# Altium PCB PCB2.PcbDoc
Units mm, origin at the board's own origin, x right, y up, seen from the top; angles counter-clockwise.
Board outline 90 x 105 mm, 2 copper layers (Top Layer, Bottom Layer); 14 components, 47 nets, 130 pads, 23 vias.
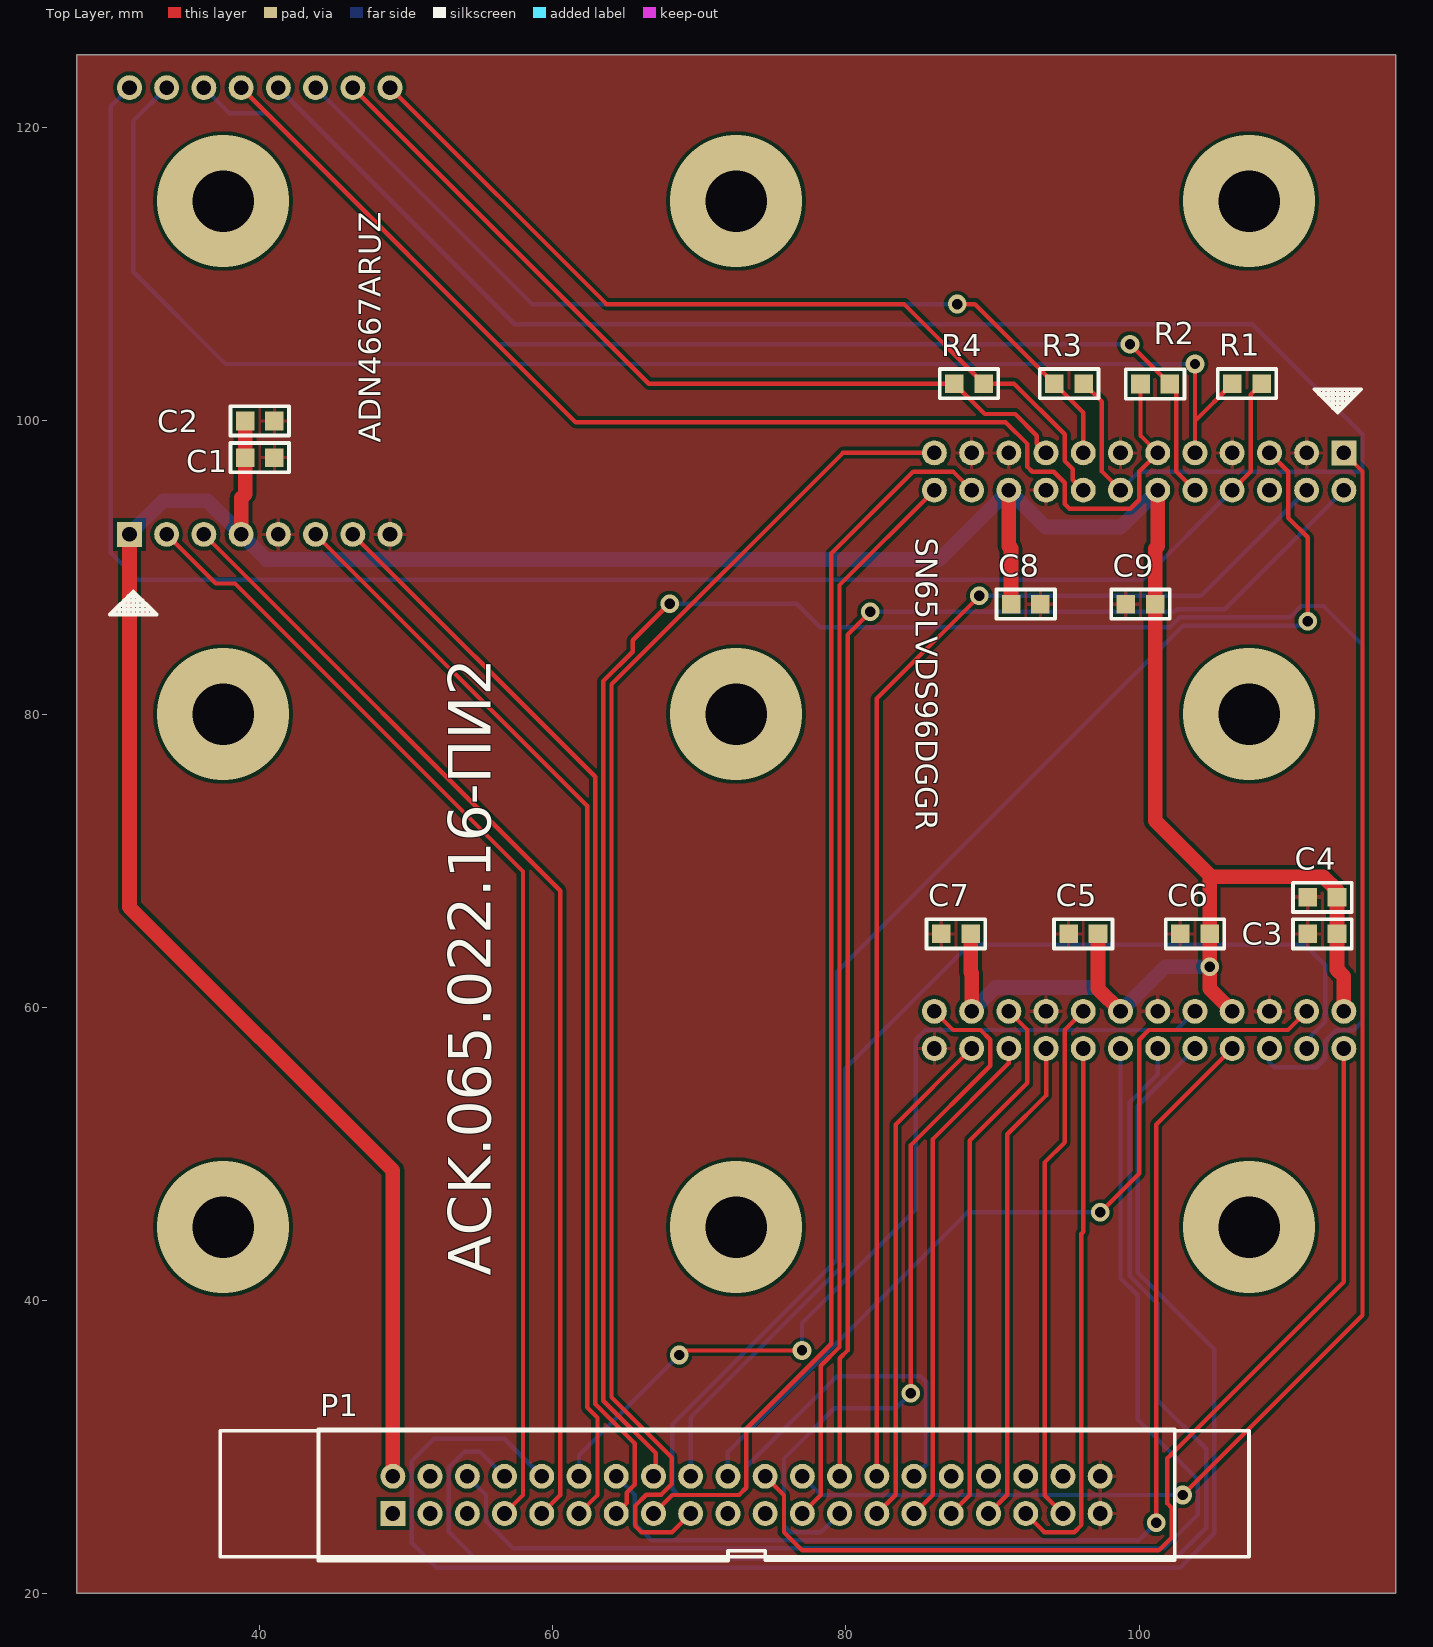
[diagram p0: Top Layer view]
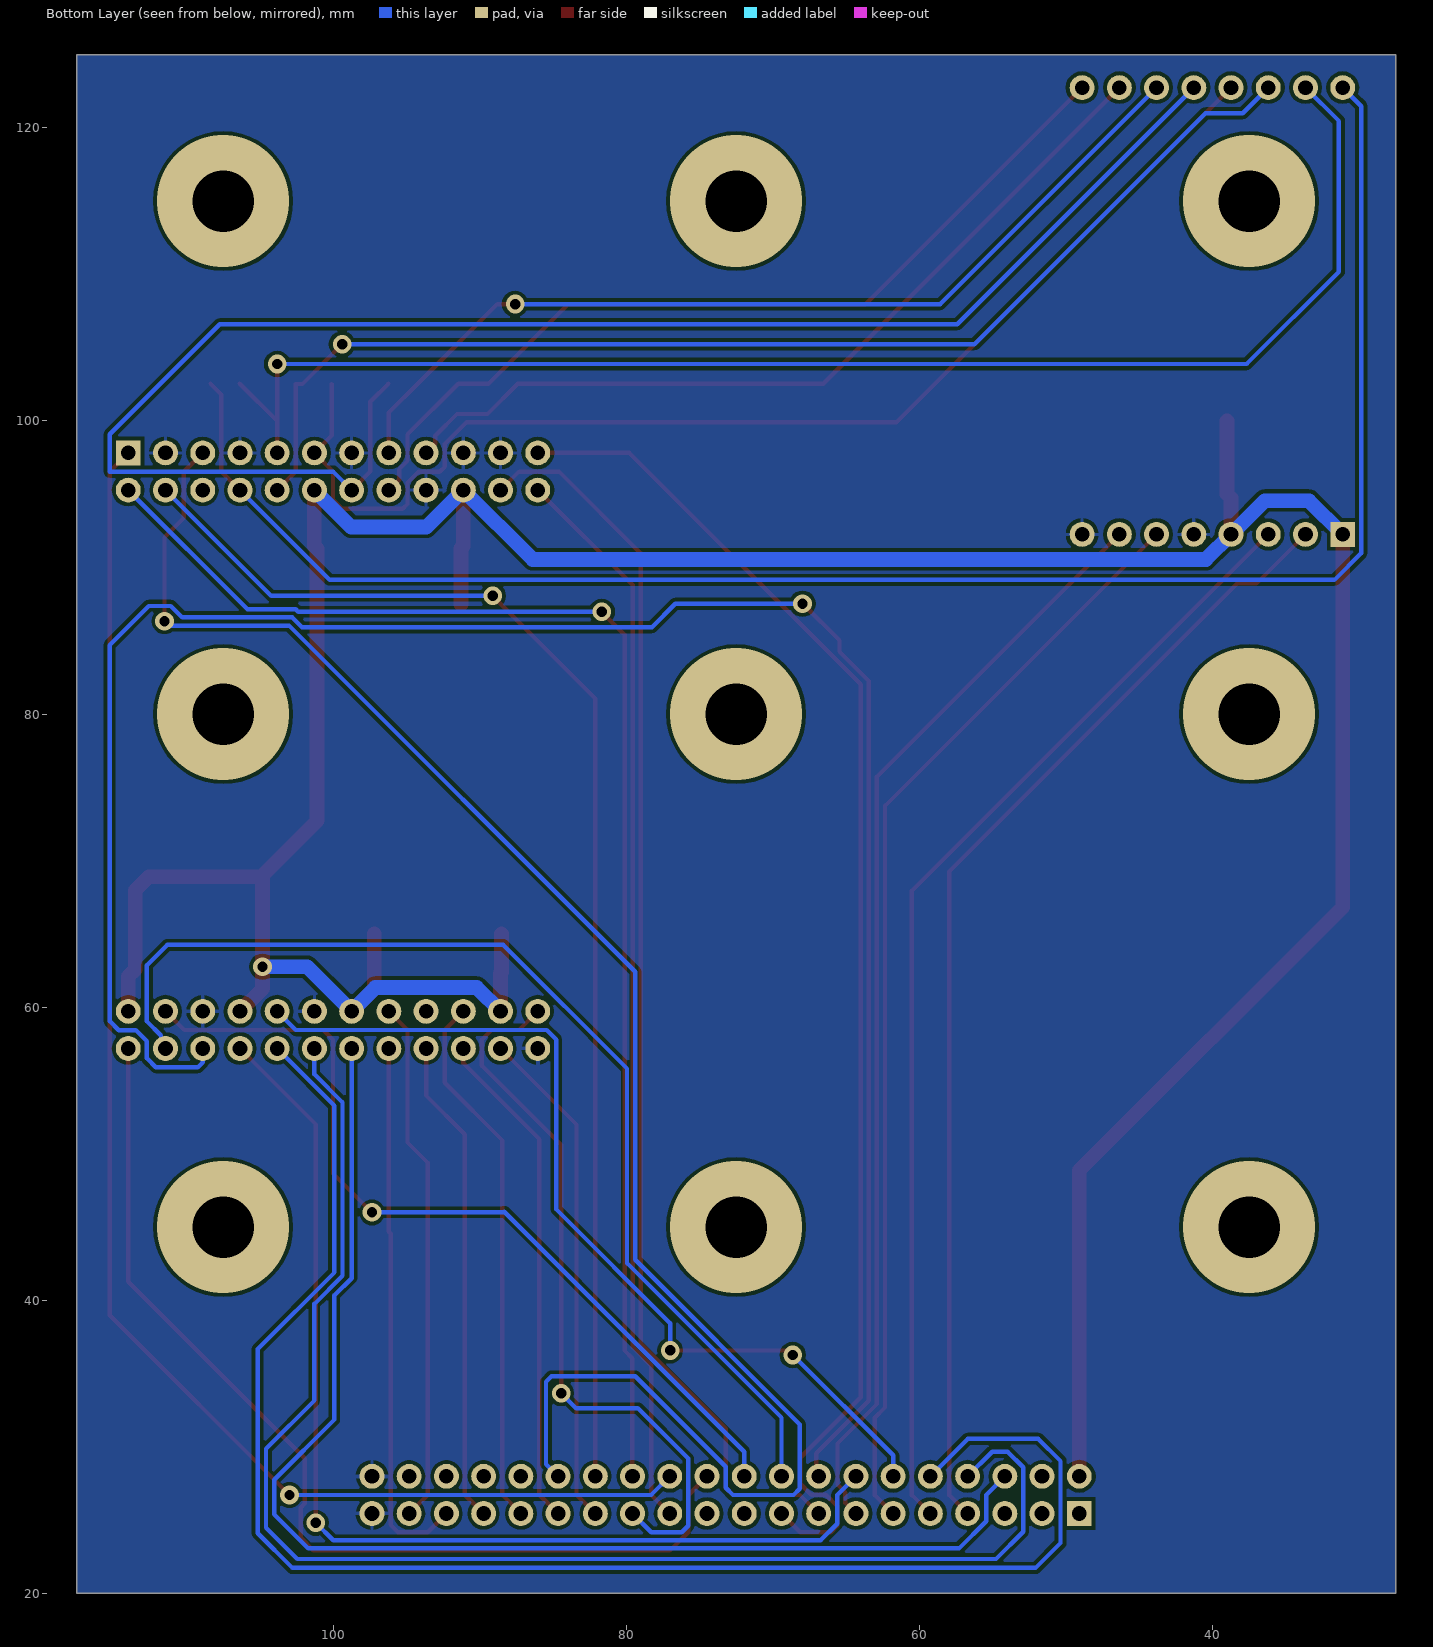
[diagram p1: Bottom Layer view, seen from below]

## Layer stack, top to bottom
Top Solder: solder mask 0.0102, Solder Resist, Dk 3.5
Top Layer: signal copper 0.0356
Dielectric 1: dielectric 0.32, FR-4, Dk 4.8
Bottom Layer: signal copper 0.0356
Bottom Solder: solder mask 0.0102, Solder Resist, Dk 3.5

## Board outline
27.5,20 117.5,20 117.5,125 27.5,125

## Design rules (kind name [scope] priority, off if disabled: settings)
Clearance [All] p1: gap=0.254
ComponentClearance [All] p1 off: gap=0.254 collisioncheckmode=3 verticalgap=0.254 showdistances=FALSE
PolygonConnect [All] p1: connectstyle=Relief reliefconductorwidth=0.254 reliefentries=4 polygonreliefangle="90 Angle" airgapwidth=0.254
RoutingVias [All] p1: holewidth=0.711 width=1.27 viastyle="Through Hole" minholewidth=0.711 minwidth=1.27 maxholewidth=0.711 maxwidth=1.27
SolderMaskExpansion [All] p1: expansion=0.102
Width Width_1 [InNetClass('power')] p1: maxlimit=1 minlimit=1 preferedwidth=1
Width [All] p2: maxlimit=0.3 minlimit=0.3 preferedwidth=0.3
29 further rules are at their usual default settings.

## Classes and differential pairs
net class power: GND VCC

## Components (designator, comment, footprint, x,y, rotation, side; value= is the part's Value field where it differs from the comment)
C1 "1uF" C_0805 40,97.5 r0 top
C2 "0.1uF" C_0805 40,100 r0 top
C3 "1uF" C_0805 112.5,65 r180 top
C4 "0.1uF" C_0805 112.5,67.5 r180 top
C5 "0.1uF" C_0805 96.19,65 r180 top
C6 "0.1uF" C_0805 103.81,65 r180 top
C7 "0.1uF" C_0805 87.5,65 r180 top
C8 "0.1uF" C_0805 92.263,87.5 r0 top
C9 "0.1uF" C_0805 100.091,87.5 r180 top
P1 "IDC-40" IDC-40 73.213,26.725 r90 top (schematic designator P7)
R1 "100 Om" R_0805 107.361,102.542 r0 top
R2 "100 Om" R_0805 101.091,102.521 r0 top
R3 "100 Om" R_0805 95.22,102.542 r0 top
R4 "100 Om" R_0805 88.391,102.542 r180 top

## Footprints (in the part's own frame and the unit in brackets; to place one, negate y for a bottom-side part, rotate by r counter-clockwise, add the part's x,y. Pads: shape width x height; smd on the part's side, far side on the other; paste and mask are expansions set on the pad)
C_0805 [mm]
  rect 1.27x1.27 smd: 1(-1,0) 2(1,0)
  silkscreen extent -2,-1 2,1
IDC-40 [mm]
  rect 1.7x1.7 hole 1: 1(-1.27,24.13)
  round 1.7 hole 1: 2(1.27,24.13) 3(-1.27,21.59) 4(1.27,21.59) 5(-1.27,19.05) 6(1.27,19.05) 7(-1.27,16.51) 8(1.27,16.51) 9(-1.27,13.97) 10(1.27,13.97) 11(-1.27,11.43) 12(1.27,11.43) 13(-1.27,8.89) 14(1.27,8.89) 15(-1.27,6.35) 16(1.27,6.35) 17(-1.27,3.81) 18(1.27,3.81) 19(-1.27,1.27) 20(1.27,1.27) 21(-1.27,-1.27) 22(1.27,-1.27) 23(-1.27,-3.81) 24(1.27,-3.81) 25(-1.27,-6.35) 26(1.27,-6.35) 27(-1.27,-8.89) 28(1.27,-8.89) 29(-1.27,-11.43) 30(1.27,-11.43) 31(-1.27,-13.97) 32(1.27,-13.97) 33(-1.27,-16.51) 34(1.27,-16.51) 35(-1.27,-19.05) 36(1.27,-19.05) 37(-1.27,-21.59) 38(1.27,-21.59) 39(-1.27,-24.13) 40(1.27,-24.13)
  silkscreen extent -4.47,-29.21 4.48,29.21
R_0805 [mm]
  rect 1.27x1.27 smd: 1(-1,0) 2(1,0)
  silkscreen extent -2,-1 2,1

## Part data
C1 C2 C3 C4 C5 C6 C7 C8 C9: library part "capacitor 0805"
P1: "разъем 2529"
R1 R2 R3 R4: library part "resistor 0805"

## Free pads (board coordinates)
  rect 1.7x1.7 hole 1: 1(31.11,92.26) 1(113.97,97.82)
  round 1.7 hole 1: 2(33.65,92.26) 2(113.97,95.28) 3(36.19,92.26) 3(111.43,97.82) 4(38.73,92.26) 4(111.43,95.28) 5(41.27,92.26) 5(108.89,97.82) 6(43.81,92.26) 6(108.89,95.28) 7(46.35,92.26) 7(106.35,97.82) 8(48.89,92.26) 8(106.35,95.28) 9(48.89,122.74) 9(103.81,97.82) 10(46.35,122.74) 10(103.81,95.28) 11(43.81,122.74) 11(101.27,97.82) 12(41.27,122.74) 12(101.27,95.28) 13(38.73,122.74) 13(98.73,97.82) 14(36.19,122.74) 14(98.73,95.28) 15(33.65,122.74) 15(96.19,97.82) 16(31.11,122.74) 16(96.19,95.28) 17(93.65,97.82) 18(93.65,95.28) 19(91.11,97.82) 20(91.11,95.28) 21(88.57,97.82) 22(88.57,95.28) 23(86.03,97.82) 24(86.03,95.28) 25(86.03,57.18) 26(86.03,59.72) 27(88.57,57.18) 28(88.57,59.72) 29(91.11,57.18) 30(91.11,59.72) 31(93.65,57.18) 32(93.65,59.72) 33(96.19,57.18) 34(96.19,59.72) 35(98.73,57.18) 36(98.73,59.72) 37(101.27,57.18) 38(101.27,59.72) 39(103.81,57.18) 40(103.81,59.72) 41(106.35,57.18) 42(106.35,59.72) 43(108.89,57.18) 44(108.89,59.72) 45(111.43,57.18) 46(111.43,59.72) 47(113.97,57.18) 48(113.97,59.72)

## Via types
v1: diameter 1.27, hole 0.711, Top Layer to Bottom Layer, 14 vias
v2: diameter 9, hole 4.2, Top Layer to Bottom Layer, 9 vias

## Nets (pads, with @x,y where several pads share a name; then routed paths per layer and width w, separated by ;. In a path a pad name is that pad's centre, name@x,y a point inside that pad or via, vN(x,y) a via of type N, cw(c..) or ccw(c..) an arc to the next point about the centre after c; other vN are vias at no path point)
5V: P1.1
+6V: P1.5
+24V: P1.3
-24V: P1.4
GND: C1.2 C2.2 C3.2 C4.2 C5.2 C6.2 C7.2 C8.2 C9.2 P1.39 P1.40 pad.3@111.43,97.82 pad.5@41.27,92.26 pad.7@106.35,97.82 pad.8@48.89,92.26 pad.13@98.73,97.82 pad.18 pad.19 pad.21 pad.25 pad.32 pad.38 pad.44 | length 0
GND24: P1.38
NetADN4667ARUZ_9: pad.9@48.89,122.74 pad.16@96.19,95.28 R4.1 | length 60.2
  Top Layer w0.3: pad.9@48.89,122.74 63.655,107.975 83.957,107.975 R4.1 91.463,102.542 94.92,99.085 94.92,97.271 95.474,96.717 95.474,95.996 pad.16@96.19,95.28
NetADN4667ARUZ_10: pad.10@46.35,122.74 pad.17 R4.2 | length 57.9
  Top Layer w0.3: pad.10@46.35,122.74 66.548,102.542 R4.2 89.46,100.473 91.542,100.473 93.022,98.993 93.022,98.448 pad.17
NetADN4667ARUZ_11: pad.11@43.81,122.74 pad.15@96.19,97.82 R3.1 | length 64.3
  Top Layer w0.3: v1(87.579,107.975) 88.787,107.975 R3.1 96.19,100.572 pad.15@96.19,97.82
  Bottom Layer w0.3: pad.11@43.81,122.74 58.575,107.975 v1(87.579,107.975)
NetADN4667ARUZ_12: pad.12@41.27,122.74 pad.14@98.73,95.28 R3.2 | length 111.6
  Top Layer w0.3: R3.2 97.46,101.303 97.46,96.55 pad.14@98.73,95.28
  Bottom Layer w0.3: pad.12@41.27,122.74 57.406,106.604 107.721,106.604 115.24,99.085 115.24,96.545 99.995,96.545 pad.14@98.73,95.28
NetADN4667ARUZ_13: pad.11@101.27,97.82 pad.13@38.73,122.74 R2.1 | length 84.1
  Top Layer w0.3: pad.13@38.73,122.74 61.551,99.919 90.886,99.919 92.38,98.425 92.38,96.864 92.71,96.534 94.169,96.534 94.92,95.784 94.92,94.336 95.25,94.005 99.39,94.005 100,94.615 100,96.55 101.27,97.82 100.091,98.999 R2.1
NetADN4667ARUZ_14: pad.10@103.81,95.28 pad.14@36.19,122.74 R2.2 | length 82.5
  Top Layer w0.3: v1(99.379,105.232) R2.2 102.54,102.521 102.54,96.55 pad.10@103.81,95.28
  Bottom Layer w0.3: pad.14@36.19,122.74 37.93,121 40.47,121 56.238,105.232 v1(99.379,105.232)
NetADN4667ARUZ_15: pad.9@103.81,97.82 pad.15@33.65,122.74 R1.1 | length 98.2
  Top Layer w0.3: pad.9@103.81,97.82 103.81,99.991 ; v1(103.81,103.886) 103.81,99.991 ; R1.1 103.81,99.991
  Bottom Layer w0.3: pad.15@33.65,122.74 31.368,120.458 31.368,110.186 37.668,103.886 v1(103.81,103.886)
NetADN4667ARUZ_16: pad.8@106.35,95.28 pad.16@31.11,122.74 R1.2 | length 120.2
  Top Layer w0.3: pad.8@106.35,95.28 107.62,96.55 107.62,101.801 R1.2
  Bottom Layer w0.3: pad.16@31.11,122.74 29.845,121.475 29.845,90.983 31.674,89.154 100.224,89.154 pad.8@106.35,95.28
PA0: P1.7 pad.2@33.65,92.26 | length 78.2
  Top Layer w0.3: pad.2@33.65,92.26 37,88.91 38.311,88.91 57.963,69.258 57.963,26.715 P1.7
PA1: P1.9 pad.3@36.19,92.26 | length 77.4
  Top Layer w0.3: pad.3@36.19,92.26 60.503,67.947 60.503,26.715 P1.9
PA2: P1.11 pad.6@43.81,92.26 | length 75.3
  Top Layer w0.3: pad.6@43.81,92.26 62.338,73.732 62.338,32.695 63.043,31.99 63.043,26.715 P1.11
PA3: P1.13 pad.7@46.35,92.26 | length 75.3
  Top Layer w0.3: pad.7@46.35,92.26 62.892,75.718 62.892,32.925 65.583,30.234 65.583,27.428 65.039,26.884 65.039,26.171 P1.13
PA4: P1.15 pad.22 | length 85.6
  Top Layer w0.3: P1.15 66.88,25.455 68.146,26.721 72.707,26.721 73.203,27.216 73.203,31.242 79,37.039 79,90.963 84.582,96.545 87.305,96.545 pad.22
PA5: P1.17 pad.23 | length 93.8
  Top Layer w0.3: P1.17 68.129,24.181 66.04,24.181 65.609,24.612 65.609,25.974 66.376,26.741 67.382,26.741 68.123,27.481 68.123,29.261 64,33.384 64,82.029 79.791,97.82 pad.23
PA6: P1.19
PA7: P1.21
PB0: P1.23 pad.24 | length 73.6
  Top Layer w0.3: P1.23 78.283,26.715 78.283,35.539 79.554,36.81 79.554,88.804 pad.24
PB1: P1.25 pad.26 | length 50.6
  Top Layer w0.3: v1(84.43,33.655) 84.43,50.597 89.84,56.007 89.84,57.785 89.179,58.445 87.305,58.445 pad.26
  Bottom Layer w0.3: P1.25 78.289,24.181 76.2,24.181 75.768,24.613 75.768,29.21 79.197,32.639 83.414,32.639 v1(84.43,33.655)
PB2: P1.27 pad.27 | length 34.4
  Top Layer w0.3: P1.27 83.388,26.74 83.388,51.998 pad.27
PB3: P1.29 pad.29 | length 34.4
  Top Layer w0.3: P1.29 85.928,26.74 85.928,51.003 91.11,56.185 pad.29
PB4: P1.31 pad.30 | length 36.9
  Top Layer w0.3: P1.31 88.443,26.715 88.443,50.902 92.38,54.839 92.38,58.45 pad.30
PB5: P1.33 pad.31 | length 33.4
  Top Layer w0.3: P1.33 91.008,26.74 91.008,51.333 93.65,53.975 pad.31
PB6: P1.35 pad.33 | length 37.1
  Top Layer w0.3: P1.35 93.537,24.181 95.567,24.181 96.063,24.676 96.063,44.552 96.19,44.679 pad.33
PB7: P1.37 pad.34 | length 35.9
  Top Layer w0.3: P1.37 93.548,26.71 93.548,49.403 94.92,50.775 94.92,58.45 pad.34
PC0: P1.6 pad.35 | length 87.9
  Bottom Layer w0.3: P1.6 55.437,26.721 55.437,24.928 57.293,23.073 101.691,23.073 104.013,25.395 104.013,27.762 99.904,31.871 99.904,40.339 98.73,41.513 pad.35
PC1: P1.8 pad.37 | length 98.3
  Bottom Layer w0.3: P1.8 55.021,29.677 53.974,29.677 52.908,28.611 52.908,24.206 54.762,22.352 102.438,22.352 104.572,24.486 104.572,29.87 101.27,33.172 101.27,39.757 99.35,41.677 99.35,53.503 101.27,55.423 pad.37
PC2: P1.10 pad.39 | length 109.5
  Bottom Layer w0.3: P1.10 56.682,30.556 51.892,30.556 50.368,29.032 50.368,23.444 52.07,21.742 102.768,21.742 105.131,24.105 105.131,36.679 99.904,41.906 99.904,53.274 pad.39
PC3: P1.12 pad.40 | length 63.9
  Top Layer w0.3: v1(68.631,36.271) 68.94,36.58 v1(77,36.58)
  Bottom Layer w0.3: P1.12 61.783,29.423 v1(68.631,36.271) ; v1(77,36.58) 77,38.443 84.76,46.203 84.76,57.785 85.42,58.445 102.535,58.445 pad.40
PC4: P1.14 pad.41 | length 74.8
  Top Layer w0.3: v1(101.168,24.816) 101.168,51.998 pad.41
  Bottom Layer w0.3: P1.14 65.597,26.721 65.597,24.765 66.735,23.627 99.979,23.627 v1(101.168,24.816)
PC5: P1.16 pad.43 | length 147.7
  Top Layer w0.3: P1.16 67.031,28.163 67.031,29.57 63.446,33.154 63.446,82.259 65.446,84.259 65.446,85.029 67.945,87.528 v1(67.97,87.528)
  Bottom Layer w0.3: v1(67.97,87.528) 76.642,87.528 78.239,85.931 102.114,85.931 102.777,86.593 110.286,86.593 111.07,87.377 112.572,87.377 115.24,84.709 115.24,59.055 114.619,58.434 113.451,58.434 112.7,57.683 112.7,56.515 112.09,55.905 109.22,55.905 108.89,56.235 pad.43
PC6: P1.18 pad.45 | length 75.2
  Bottom Layer w0.3: P1.18 69.403,32.001 79.942,42.54 79.942,55.812 88.398,64.268 111.297,64.268 112.7,62.865 112.7,59.03 111.76,58.09 pad.45
PC7: P1.20 pad.46 | length 59
  Top Layer w0.3: v1(97.343,46) 100,48.657 100,57.785 100.66,58.445 110.155,58.445 pad.46
  Bottom Layer w0.3: P1.20 71.943,29.677 88.316,46.05 88.366,46 v1(97.343,46)
PD0: P1.22 pad.47 | length 70.1
  Top Layer w0.3: P1.22 75.768,26.71 75.768,24.181 77.013,22.936 101.346,22.936 102.21,23.8 102.21,25.857 101.93,26.137 101.93,29.23 113.97,41.27 pad.47
PD1: P1.24 pad.1@113.97,97.82 | length 103.2
  Top Layer w0.3: v1(102.972,26.721) 115.24,38.989 115.24,96.55 pad.1@113.97,97.82
  Bottom Layer w0.3: P1.24 78.297,26.721 v1(102.972,26.721)
PD2: P1.26 pad.2@113.97,95.28 | length 95.6
  Top Layer w0.3: P1.26 79.578,28.931 79.578,36.05 80.108,36.58 80.108,85.417 v1(81.661,86.97)
  Bottom Layer w0.3: v1(81.661,86.97) 102.37,86.97 102.547,87.147 105.837,87.147 pad.2@113.97,95.28
PD3: P1.28 pad.4@111.43,95.28 | length 88.3
  Top Layer w0.3: P1.28 82.103,81.062 v1(89.103,88.062)
  Bottom Layer w0.3: v1(89.103,88.062) 104.212,88.062 pad.4@111.43,95.28
PD4: P1.30 pad.5@108.89,97.82 | length 123.3
  Top Layer w0.3: pad.5@108.89,97.82 110.176,96.534 110.176,93.383 111.5,92.058 v1(111.5,86.338)
  Bottom Layer w0.3: P1.30 85.471,28.823 85.471,34.442 85.09,34.823 79.388,34.823 73.203,28.639 73.203,27.216 72.707,26.721 68.58,26.721 68.148,27.153 68.148,31.53 79.388,42.769 79.388,62.42 103.006,86.039 111.412,86.039 111.5,86.127 v1(111.5,86.338)
PD5: P1.32
PD6: P1.34
PD7: P1.36
VCC: C1.1 C2.1 C3.1 C4.1 C5.1 C6.1 C7.1 C8.1 C9.1 P1.2 pad.1@31.11,92.26 pad.4@38.73,92.26 pad.12@101.27,95.28 pad.20 pad.28 pad.36 pad.42 pad.48 | length 249.6
  Top Layer w1: pad.1@31.11,92.26 31.11,66.832 49.083,48.859 P1.2 ; pad.4@38.73,92.26 38.73,94.742 39,95.012 C1.1 C2.1 ; C7.1 88.5,62.376 88.57,62.306 pad.28 ; pad.20 91.11,91.466 91.263,91.313 C8.1 ; C5.1 97.19,61.26 pad.36 ; pad.12@101.27,95.28 101.27,91.467 101.091,91.288 C9.1 101.091,72.719 104.81,69 C6.1 v1(104.81,62.763) 104.81,61.26 pad.42 ; 104.9,68.91 112.573,68.91 113.5,67.983 C4.1 C3.1 113.5,62.573 113.97,62.103 pad.48
  Bottom Layer w1: pad.1@31.11,92.26 33.414,94.564 36.426,94.564 38.73,92.26 40.439,90.551 86.381,90.551 pad.20 93.629,92.761 98.751,92.761 pad.12@101.27,95.28 ; pad.28 90.191,61.341 97.109,61.341 pad.36 101.773,62.763 v1(104.81,62.763)
copper on no net:
  other v2: 37.5,45 72.5,45 107.5,45 37.5,80 72.5,80 107.5,80 37.5,115 72.5,115 107.5,115

## Polygon pours and split planes (outlines as drawn)
GND on Top Layer "top layer gnd" (solid, pour order 2): 27.5,125 117.5,125 117.5,20 27.5,20
GND on Bottom Layer "bot layer gnd" (solid, pour order 4): 27.5,125 117.5,125 117.5,20 27.5,20

## Silkscreen, mask and mechanical layers (free items; w line width, h text height)
Top Overlay:
  lines w0.254: 30.098,86.792 30.098,87.109 32.638,87.109 32.638,86.792 ; 30.416,86.792 30.416,87.427 32.321,87.427 32.321,86.792 ; 30.733,86.792 30.733,87.744 32.003,87.744 32.003,86.792 ; 31.051,86.792 31.051,88.062 31.686,88.062 31.686,86.792 ; 31.368,86.792 31.368,88.379 ; 112.28,102.156 112.28,101.839 114.82,101.839 114.82,102.156 ; 112.597,102.156 112.597,101.521 114.502,101.521 114.502,102.156 ; 112.915,102.156 112.915,101.204 114.185,101.204 114.185,102.156 ; 113.232,102.156 113.232,100.886 113.867,100.886 113.867,102.156 ; 113.55,102.156 113.55,100.569 ; 31.368,88.379 29.781,86.792 32.956,86.792 31.368,88.379 ; 113.55,100.569 111.962,102.156 115.137,102.156 113.55,100.569 ; 37.3,22.5 107.5,22.5 107.5,31.1 37.3,31.1 37.3,22.5
  text "ADN4667ARUZ" at 48.27,98.5 h1.52 r90
  text "SN65LVDS96DGGR" at 84.753,92.026 h1.52 r270
  text "ACK.065.022.16-ПИ2" at 56.708,41.679 h5 r90
Mechanical 1:
  the board outline again, w1